# EAGLE board e (EAGLE 7.1.0)
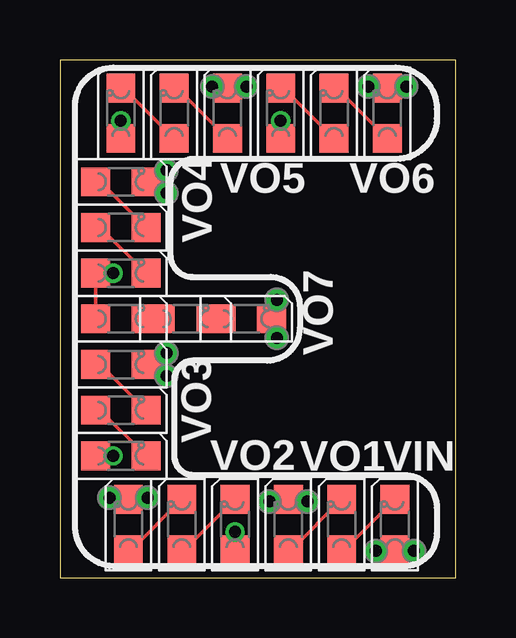
[diagram p0: board, top side]
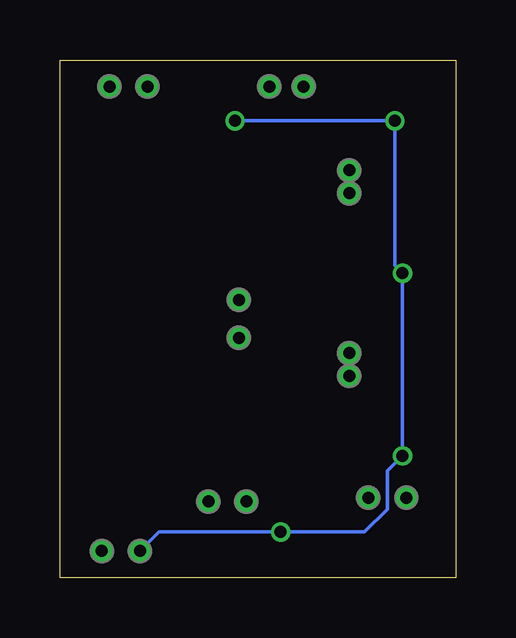
[diagram p1: board, bottom side, seen from below]

Size 16.51 x 21.59 mm. Coordinates in mm from the lower left corner, seen from the top.
Outline: 0,0 16.51,0 16.51,21.59 0,21.59 0,0
Copper layers (1*16): Top 0.035mm / dielectric 1.5mm / Bottom 0.035mm
Design rules "Fusion_eagle_rule_v1.1_tms *": minimum track width 6mil, minimum drill 12mil, track to track 6mil, track to pad 6mil, pad to pad 6mil, via to via 6mil, smd to smd 0mil, copper to edge 10mil, drill to drill 10mil, minimum pad ring 10mil, minimum via ring 6mil, stop-mask expansion 2mil, vias tented up to drill 100mil, thermal gap 10mil

## Footprints (pad centres in the part's own frame; a part is rotated, then mirrored left to right if it is on the bottom)
LED_0805 = smd 1.2 x 1.2: A 0,-1.05; C 0,1.05
P1-20 = drill 0.5: TP 0,0

## Placement (x,y rotation side)
LED1  [LED_0805]  13.97,2.22 0 top
LED2  [LED_0805]  11.75,2.22 0 top
LED3  [LED_0805]  9.53,2.22 0 top
LED4  [LED_0805]  7.3,2.22 0 top
LED5  [LED_0805]  5.08,2.22 0 top
LED6  [LED_0805]  2.86,2.22 0 top
LED7  [LED_0805]  2.54,5.08 270 top
LED8  [LED_0805]  2.54,6.99 270 top
LED9  [LED_0805]  2.54,8.89 270 top
LED10  [LED_0805]  2.54,12.7 270 top
LED11  [LED_0805]  2.54,14.61 270 top
LED12  [LED_0805]  2.54,16.51 270 top
LED13  [LED_0805]  2.54,19.37 0 top
LED14  [LED_0805]  4.76,19.37 0 top
LED15  [LED_0805]  6.99,19.37 0 top
LED16  [LED_0805]  9.21,19.37 0 top
LED17  [LED_0805]  11.43,19.37 0 top
LED18  [LED_0805]  13.65,19.37 0 top
LED19  [LED_0805]  2.54,10.79 270 top
LED20  [LED_0805]  5.24,10.79 270 top
LED21  [LED_0805]  7.78,10.79 270 top
VIN  [P1-20]  14.76,1.11 0 top
VIN1  [P1-20]  13.18,1.11 0 top
VO1  [P1-20]  8.73,3.17 0 top
VO2  [P1-20]  2.06,3.33 0 top
VO3  [P1-20]  4.45,8.41 0 top
VO4  [P1-20]  4.45,16.03 0 top
VO5  [P1-20]  6.35,20.48 0 top
VO6  [P1-20]  14.45,20.48 0 top
VO7  [P1-20]  9.05,10 0 top
VO8  [P1-20]  10.32,3.17 0 top
VO9  [P1-20]  3.65,3.33 0 top
VO10  [P1-20]  4.45,9.37 0 top
VO11  [P1-20]  4.45,16.99 0 top
VO12  [P1-20]  7.78,20.48 0 top
VO13  [P1-20]  12.86,20.48 0 top
VO14  [P1-20]  9.05,11.59 0 top

## Library data of the parts
LED1-LED21 VIN VIN1 VO1-VO14 = CyberRailGuru

## Nets
N$1: LED19.C LED20.A
N$2: LED20.C LED21.A
N$3: LED21.C VO7.TP VO14.TP
N$39: LED2.C LED3.A
N$40: LED1.C LED2.A
N$41: LED5.C LED6.A
N$42: LED4.C LED5.A
N$43: LED8.C LED9.A
N$44: LED7.C LED8.A
N$45: LED11.C LED12.A
N$46: LED10.C LED11.A
N$47: LED14.C LED15.A
N$48: LED13.C LED14.A
N$49: LED17.C LED18.A
N$50: LED16.C LED17.A
VIN: LED1.A LED4.A LED7.A LED10.A LED13.A LED16.A LED19.A VIN1.TP VIN.TP
VOUT1: LED3.C VO1.TP VO8.TP
VOUT2: LED6.C VO2.TP VO9.TP
VOUT3: LED9.C VO3.TP VO10.TP
VOUT4: LED12.C VO4.TP VO11.TP
VOUT5: LED15.C VO5.TP VO12.TP
VOUT6: LED18.C VO6.TP VO13.TP

## Tracks (layer width: path | path; a pad name or v marks a point on that pad's centre or on a via)
N$1
  Top 0.152: LED20.A LED19.C
N$2
  Top 0.152: LED21.A LED20.C
N$3
  Top 0.152: LED21.C 9.05,11.02 VO14.TP VO7.TP
N$39
  Top 0.152: LED3.A 9.65,1.17 LED2.C
N$40
  Top 0.152: LED2.A 11.87,1.17 LED1.C
N$41
  Top 0.152: LED6.A 2.98,1.17 LED5.C
N$42
  Top 0.152: LED5.A 5.2,1.17 LED4.C
N$43
  Top 0.152: LED9.A 1.69,8.89 LED8.C
N$44
  Top 0.152: LED8.A 1.69,6.99 LED7.C
N$45
  Top 0.152: LED12.A 1.69,16.51 LED11.C
N$46
  Top 0.152: LED11.A 1.69,14.61 LED10.C
N$47
  Top 0.152: LED14.C 4.88,20.42 LED15.A
N$48
  Top 0.152: LED13.C 2.66,20.42 LED14.A
N$49
  Top 0.152: LED17.C 11.55,20.42 LED18.A
N$50
  Top 0.152: LED16.C 9.33,20.42 LED17.A
VIN  (via drill 0.5)
  Top 0.152: VIN1.TP 13.91,1.11 LED1.A 14.03,1.11 VIN.TP | v7.3,1.91 LED4.A | LED7.A v2.22,5.08 | v2.54,19.05 LED13.A | LED16.A v9.21,19.05 | v2.22,12.7 LED10.A LED19.A
  Bottom 0.152: VIN1.TP 12.38,1.91 v7.3,1.91 3.81,1.91 2.86,2.86 2.86,4.45 v2.22,5.08 v2.22,12.7 2.54,13.02 v2.54,19.05 v9.21,19.05
VOUT1
  Top 0.152: VO1.TP 9.43,3.17 LED3.C 9.62,3.17 VO8.TP
VOUT2
  Top 0.152: VO2.TP 2.8,3.33 LED6.C 2.92,3.33 VO9.TP
VOUT3
  Top 0.152: LED9.C 4.07,8.41 VO3.TP VO10.TP
VOUT4
  Top 0.152: LED12.C 4.07,16.03 VO4.TP VO11.TP
VOUT5
  Top 0.152: VO5.TP 6.92,20.48 LED15.C 7.05,20.48 VO12.TP
VOUT6
  Top 0.152: VO13.TP 13.59,20.48 LED18.C 13.71,20.48 VO6.TP

## Text on the board
201bmp: E